# Altium PCB FPv0.11.PcbDoc
Units mm, origin at the board's own origin, x right, y up, seen from the top; angles counter-clockwise.
Board outline 81.28 x 53.34 mm, 4 copper layers (Top Layer, GROUND PLANE, MidLayer1, Bottom Layer); 97 components, 157 nets, 584 pads, 193 vias.
Unrouted connection lines stored in the file: 164.
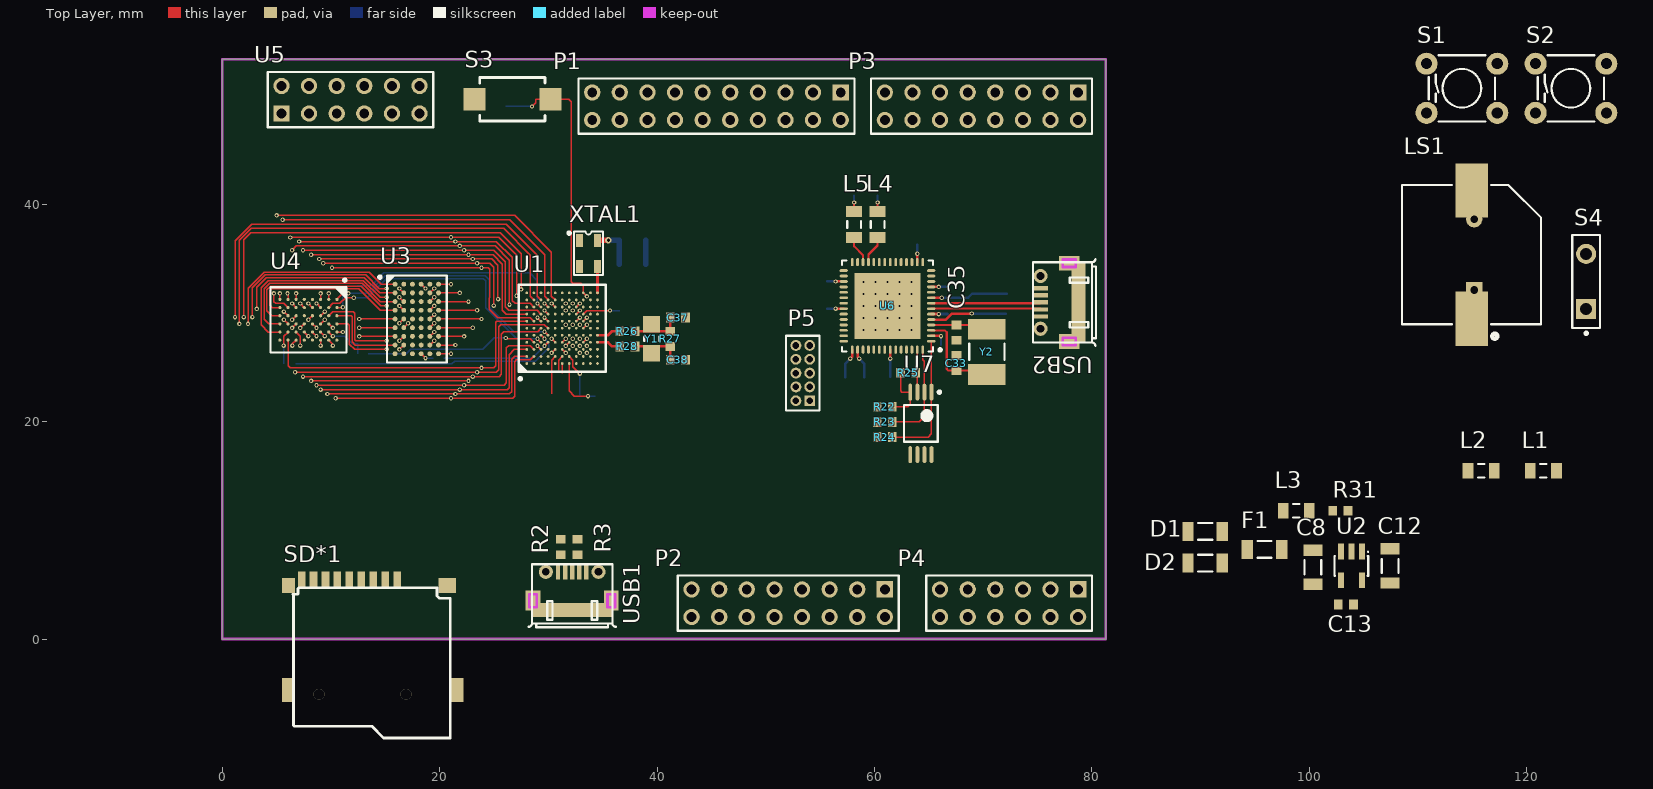
[diagram p0: Top Layer view]
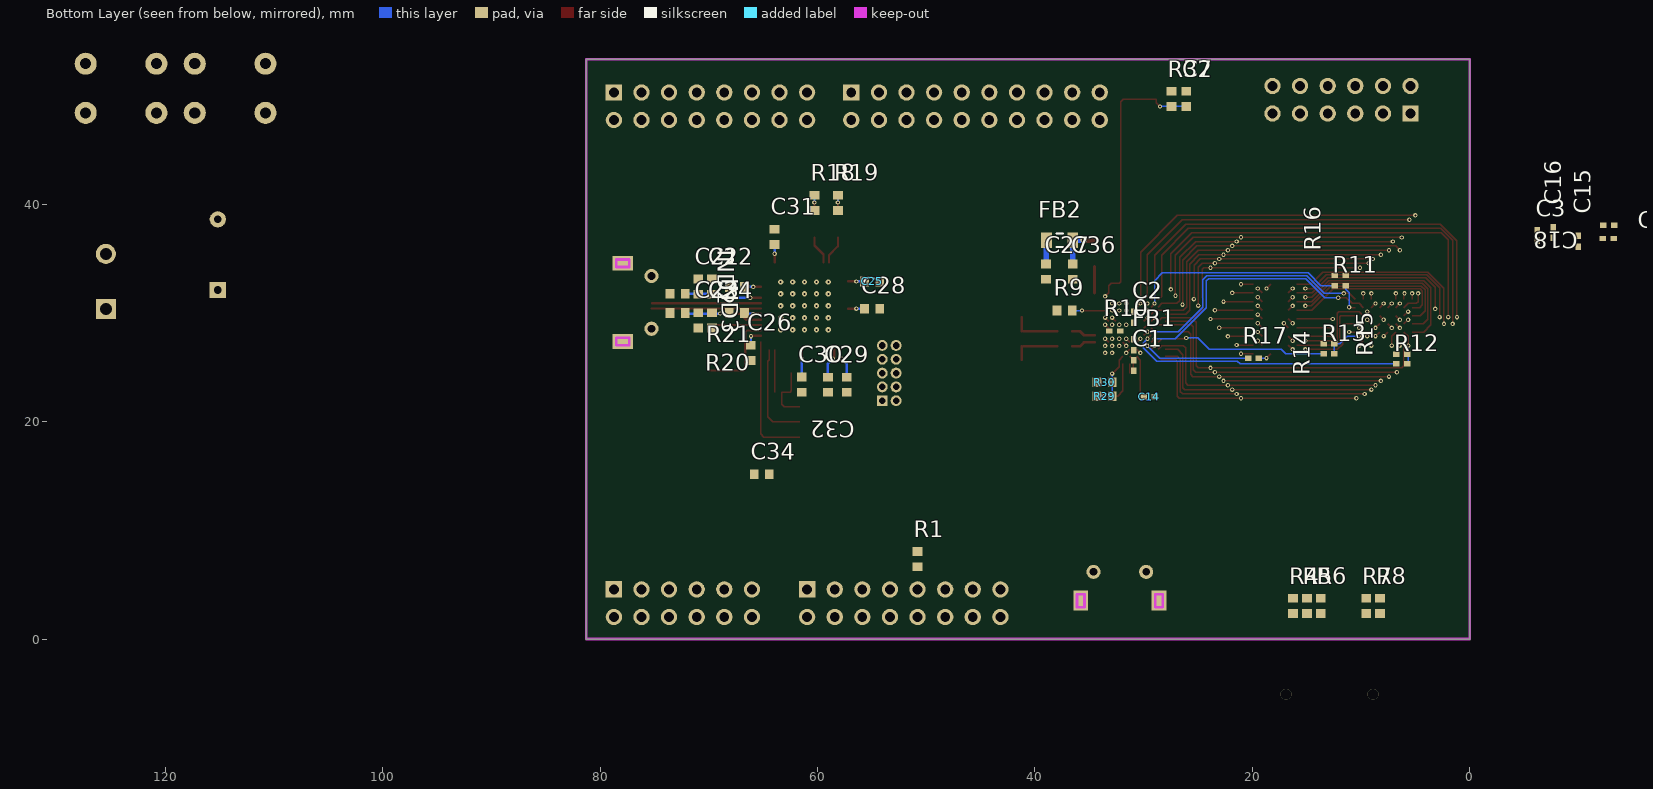
[diagram p1: Bottom Layer view, seen from below]
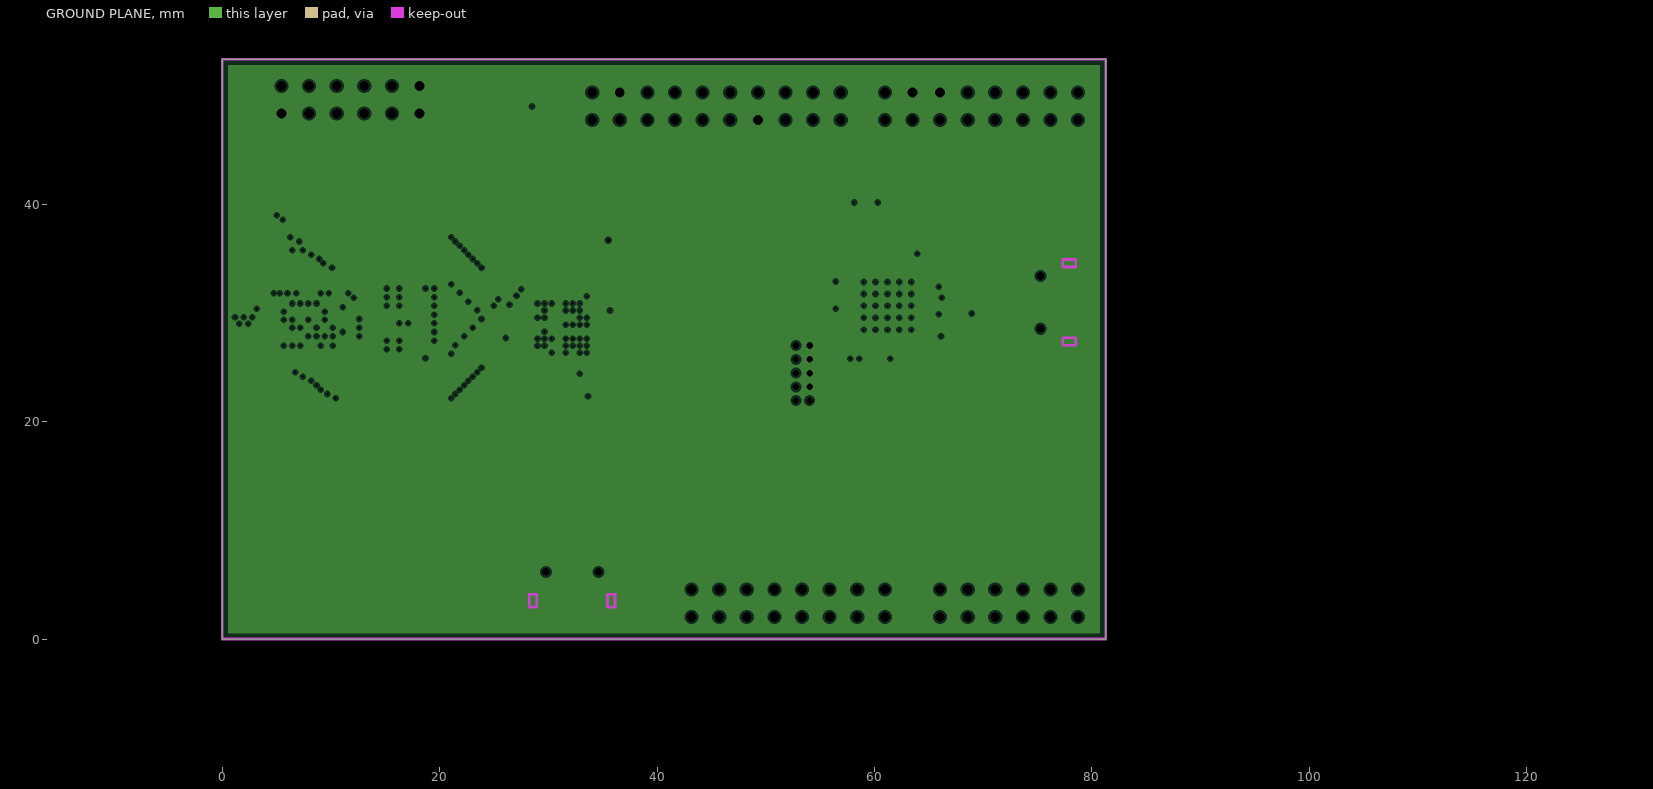
[diagram p2: GROUND PLANE, clearances drawn from the general rule]
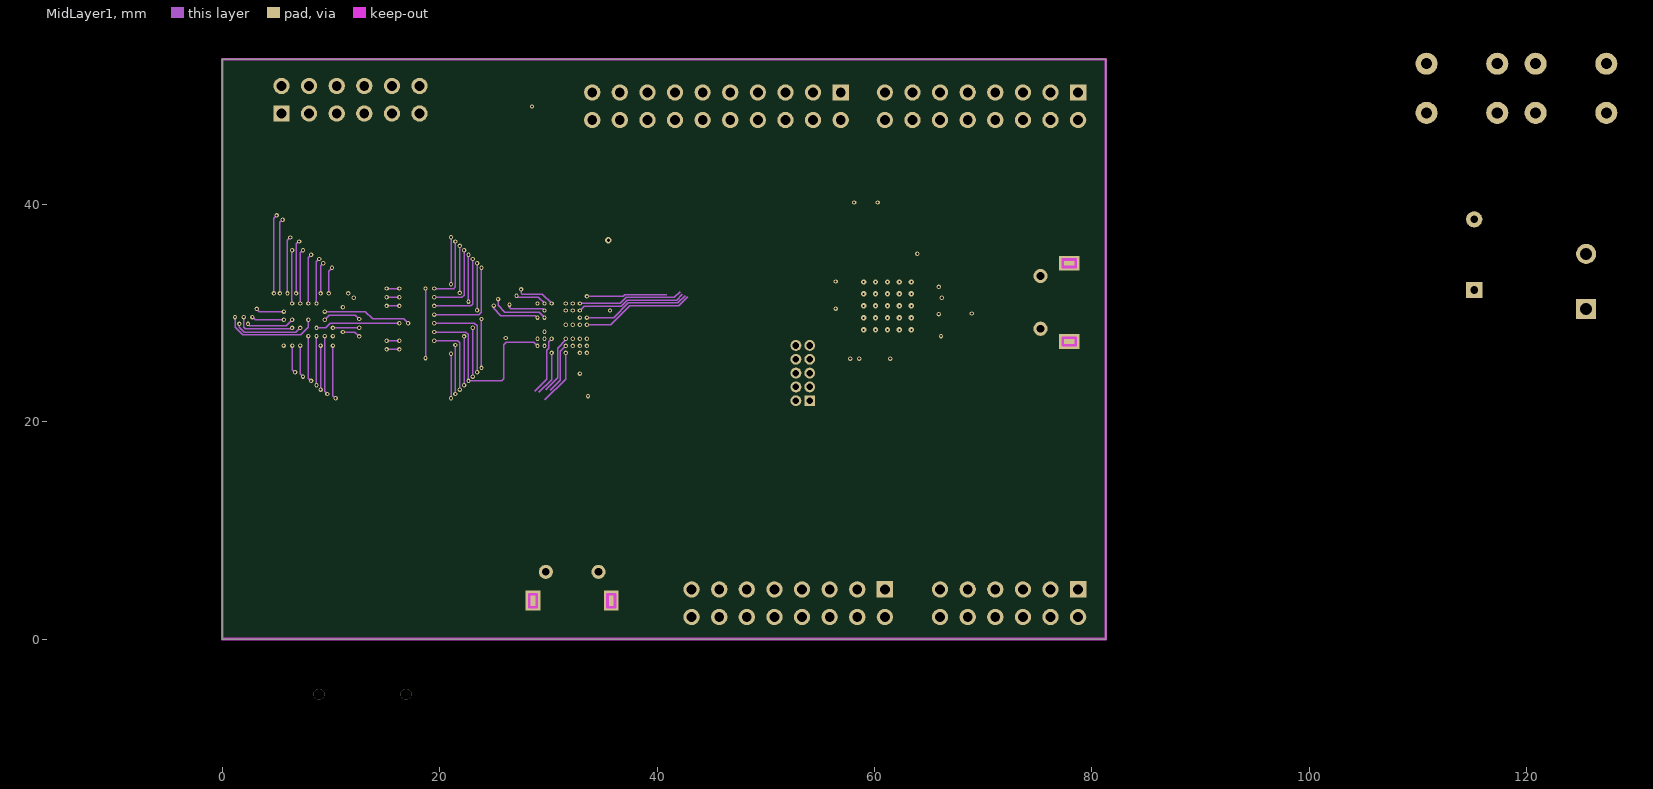
[diagram p3: MidLayer1]

## Layer stack, top to bottom
Top Layer: signal copper 0.0356
Dielectric: prepreg 0.32, FR-4, Dk 4.8
GROUND PLANE: plane copper 0.0356, net GND
Dielectric: core 0.32, FR-4, Dk 4.8
MidLayer1: signal copper 0.0356
Dielectric: prepreg 0.32, FR-4, Dk 4.8
Bottom Layer: signal copper 0.0356

## Board outline
0,0 0,53.34 81.28,53.34 81.28,0

## Design rules (kind name [scope] priority, off if disabled: settings)
Clearance [All] p1: gap=0.127
DiffPairsRouting [All] p1: maxlimit=0.254 minlimit=0.254 mostfreqgap=0.254 maxuncoupledlength=12.7
HoleSize [All] p1: absolutevalues=TRUE maxlimit=2.54 minlimit=0.2 maxpercent=80.000 minpercent=20.000
PlaneClearance [All] p1: clearance=0.203
PlaneConnect [All] p1: planeconnectstyle=Relief reliefexpansion=0.508 reliefentries=4 reliefconductorwidth=0.254 reliefairgap=0.254
PolygonConnect [All] p1: connectstyle=Relief reliefconductorwidth=0.254 reliefentries=4 polygonreliefangle="90 Angle" airgapwidth=0.254
RoutingVias [All] p1: holewidth=0.711 width=1.27 viastyle="Through Hole" minholewidth=0.711 minwidth=1.27 maxholewidth=0.711 maxwidth=1.27
SolderMaskExpansion [All] p1: expansion=0.102
Width [All] p1: maxlimit=1.778 minlimit=0.127 preferedwidth=0.254 midlayer1_maxwidth=0.254 minimp=50.000000 maximp=50.000000 favimp=50.000000
24 further rules are at their usual default settings.

## Classes and differential pairs
net class PTE[0..6]: PTE0 PTE1 PTE2 PTE3 PTE4 PTE5 PTE6 PTE24 PTE25 PTE26
net class AD[20..0]: AD0 AD1 AD2 AD3 AD4 AD5 AD6 AD7 AD8 AD9 AD10 AD11 AD12 AD13 AD14 AD15 AD16 AD17 AD18 AD19 AD20
component class RF_mod: U5
component class protocol2: C21 C22 C23 C24 C25 C26 C28 C29 C30 C31 C32 C33 C34 C35 IND2 IND3 L4 L5 R18 R19 R20 R21 R22 R23 R24 R25 U6 U7 USB2 Y2
component class protocol1: L1 L2 LS1 P1 P2 P3 P4 R1 R2 R3 S1 S2 SD*1 USB1
component class power_manage: C8 C12 C13 D1 D2 F1 L3 R31 S4 U2
component class Memory: C14 C15 C16 C17 C18 R11 R12 R13 R14 R15 R16 R17 U3 U4
component class MCU_K64FX: C1 C2 C3 C7 C27 C36 C37 C38 FB1 FB2 P5 R4 R5 R6 R7 R8 R9 R10 R26 R27 R28 R29 R30 R32 S3 U1 XTAL1 Y1
from-to class SRAM_DATA: "AD0 (U1-B2 : U4-B6)" "AD1 (U1-A2 : U4-C5)" "AD2 (U1-A3 : U4-C6)" "AD3 (U1-B3 : U4-D5)" "AD4 (U1-C3 : U4-E5)" "AD5 (U1-C6 : U4-F5)" "AD6 (U1-D6 : U4-F6)" "AD7 (U1-A7 : U4-G6)" "AD8 (U1-B7 : U4-B1)" "AD9 (U1-C7 : U4-C1)" "AD10 (U1-D7 : U4-C2)" "AD11 (U1-A8 : U4-D2)" "AD12 (U1-C8 : U4-E2)" "AD13 (U1-D8 : U4-F2)" "AD14 (U1-B9 : U4-F1)" "AD15 (U1-D9 : U4-G1)" "AD16 (U1-E9 : U4-F4)" "AD17 (U1-B10 : U4-E4)" "AD18 (U1-C10 : U4-D3)" "AD19 (U1-D10 : U4-H1)" "AD20 (U1-E10 : U4-G2)"
differential pair USB1D: +USB1D_P -USB1D_N
differential pair USB0D: +USB0D_P -USB0D_N

## Components (designator, comment, footprint, x,y, rotation, side; value= is the part's Value field where it differs from the comment)
C1 "Cap" 0402 30.894,25.171 r90 bottom
C2 "Cap" 0402 30.894,29.616 r270 bottom
C3 "Cap" 0402 -6.225,37.125 r90 bottom
C7 "Cap" 1608[0603] 26.075,49.7 r270 bottom
C8 "Cap Pol1" 1206(2) 100.33,6.604 r270 top
C12 "Cap Pol1" 1206(2) 107.442,6.731 r90 top
C13 "Cap" 1608[0603] 103.378,3.175 r180 top
C14 "Cap Pol1" 0402 29.475,22.275 r0 bottom
C15 "Cap" 0402 -9.965,36.584 r270 bottom
C16 "Cap" 0402 -7.679,37.409 r270 bottom
C17 "Cap" 0402 -12.777,38.062 r0 bottom
C18 "Cap" 0402 -12.75,36.85 r180 bottom
C21 "Cap Pol1" 1608[0603] 70.975,32.425 r90 bottom
C22 "Cap" 1608[0603] 69.725,32.425 r270 bottom
C23 "Cap Pol1" 1608[0603] 70.975,29.325 r270 bottom
C24 "Cap" 1608[0603] 69.725,29.325 r90 bottom
C25 "Cap" 1608[0603] 54.975,32.9 r0 bottom
C26 "Cap" 1608[0603] 66.153,26.332 r90 bottom
C27 "Cap" 1608[0603] 38.975,33.8 r90 bottom
C28 "Cap" 1608[0603] 54.977,30.396 r0 bottom
C29 "Cap" 1608[0603] 59.05,23.4 r90 bottom
C30 "Cap" 1608[0603] 61.454,23.411 r90 bottom
C31 "Cap" 1608[0603] 63.95,37 r270 bottom
C32 "Cap" 1608[0603] 57.325,23.4 r270 bottom
C33 "Cap" 1608[0603] 67.55,25.398 r270 top
C34 "Cap" 1608[0603] 65.137,15.156 r0 bottom
C35 "Cap" 1608[0603] 67.55,28.192 r270 top
C36 "Cap" 1608[0603] 36.525,33.8 r90 bottom
C37 "Cap" 1608[0603] 41.925,29.575 r180 top
C38 "Cap" 1608[0603] 41.925,25.7 r180 top
D1 "Diode 1N4001" 1206(2) 90.424,9.906 r0 top
D2 "Diode 1N4001" 1206(2) 90.424,6.985 r0 top
F1 "300-500mA" 1206(2) 95.885,8.255 r0 top
FB1 "Inductor" 0402 30.894,27.076 r90 bottom
FB2 "Inductor" C2012 37.725,36.7 r180 bottom
IND2 "Inductor" 1608[0603] 72.875,31.775 r180 bottom
IND3 "Inductor" 1608[0603] 72.875,30 r180 bottom
L1 "LED" C2012 121.539,15.494 r0 top
L2 "LED" C2012 115.824,15.494 r0 top
L3 "LED" C2012 98.806,11.811 r0 top
L4 "LED" C2012 60.29,38.143 r270 top
L5 "LED" C2012 58.131,38.143 r270 top
LS1 "Buzzer" ABSM-1574 114.935,29.464 r90 top
P1 "Header 10X2" HDR2X10 56.896,50.292 r180 top
P2 "Header 8X2" HDR2X8 60.96,4.572 r180 top
P3 "Header 8X2" HDR2X8 78.74,50.292 r180 top
P4 "Header 6X2" HDR2X6 78.74,4.572 r180 top
P5 "JTAG" MHDR2X5 54.045,21.93 r90 top
R1 "Res" 1608[0603] 50.8,7.366 r90 bottom
R2 "Res" 1608[0603] 31.149,8.471 r270 top
R3 "Res" 1608[0603] 32.673,8.471 r270 top
R4 "Res" 1608[0603] 16.256,3.048 r90 bottom
R5 "Res" 1608[0603] 14.986,3.048 r90 bottom
R6 "Res" 1608[0603] 13.716,3.048 r90 bottom
R7 "Res" 1608[0603] 9.525,3.048 r90 bottom
R8 "Res" 1608[0603] 8.255,3.048 r90 bottom
R9 "Res" 1608[0603] 37.275,30.225 r180 bottom
R10 "Res" 0402 32.672,28.346 r180 bottom
R11 "Res" 0402 11.925,32.525 r0 bottom
R12 "Res" 0402 6.25,25.325 r0 bottom
R13 "Res" 0402 12.95,26.25 r0 bottom
R14 "Res" 0402 12.95,27.175 r0 bottom
R15 "Res" 0402 6.25,26.2 r0 bottom
R16 "Res" 0402 11.925,33.45 r0 bottom
R17 "Res" 0402 19.9,25.825 r180 bottom
R18 "Res" 1608[0603] 60.29,40.121 r270 bottom
R19 "Res" 1608[0603] 58.131,40.121 r270 bottom
R20 "Res" 1608[0603] 67.425,30 r0 bottom
R21 "Res" 1608[0603] 67.425,32.4 r0 bottom
R22 "Res" 1608[0603] 60.946,21.379 r0 top
R23 "Res" 1608[0603] 60.946,19.982 r0 top
R24 "Res" 1608[0603] 60.946,18.585 r0 top
R25 "Res" 1608[0603] 63.1,24.5 r180 top
R26 "Res" 1608[0603] 37.279,28.327 r180 top
R27 "Res" 1608[0603] 41.225,27.625 r270 top
R28 "Res" 1608[0603] 37.279,26.93 r180 top
R29 "Res" 1608[0603] 33.6,22.35 r0 bottom
R30 "Res" 1608[0603] 33.6,23.625 r180 bottom
R31 "Res" 1608[0603] 102.87,11.811 r180 top
R32 "Res" 1608[0603] 27.436,49.694 r270 bottom
S1 "BUTON" TACTILE-PTH 114.046,50.673 r0 top
S2 "BUTON" TACTILE-PTH 124.079,50.673 r0 top
S3 "SW-PB" SMT_Button 26.696,49.667 r0 top
S4 "SW-SPST" SPST-2 125.476,32.893 r90 top
SD*1 "TF_card" SD_card 11.938,-3.302 r90 top
U1 "MK64FX512VDC" BGA121C65P11X11_800X800X50 31.275,28.6 r90 top
U2 "MIC5219" SOT-23-5 103.886,6.731 r180 top
U3 "SN74LVC16373A(BGA54)" BGA54C80P6X9_550X800X120 17.9,29.45 r0 top
U4 "EM7164SU16" BGA48C75P6X8_598X698X104 7.925,29.375 r270 top
U5 "MRF24J40" HDR2X6 5.45,48.35 r0 top
U6 "FT2232H-56" QFN50P800X800X90_HS-57N 61.2,30.65 r180 top
U7 "AT93C46D" TSOP65P640X120-8N-AT93C46D 64.275,19.85 r270 top
USB1 "USB_5line" USB-MICRO-5P-2F 30.895,6.185 r180 top
USB2 "USB_5line" USB-MICRO-5P-2F 75.275,29.675 r270 top
XTAL1 "有源晶体" XTAL7_3225 33.688,35.489 r270 top
Y1 "XTAL" 3215 39.5,27.625 r270 top
Y2 "12MHz" 5032 70.344,26.414 r270 top

## Footprints (in the part's own frame and the unit in brackets; to place one, negate y for a bottom-side part, rotate by r counter-clockwise, add the part's x,y. Pads: shape width x height; smd on the part's side, far side on the other; paste and mask are expansions set on the pad)
0402 [mm] "Chip Capacitor, Body 1.0x0.5mm, IPC High Density"
  rect 0.6x0.5 smd: 1(-0.5,0) 2(0.5,0)
  body extent -0.55,-0.3 0.55,0.3, height 1.3
1206(2) [mm]
  rect 1.05x1.75 smd: 1(-1.575,0) 2(1.575,0)
  silkscreen extent -0.65,-0.77 0.65,0.77, body extent -1.6,-0.8 1.6,0.8, height 1.6
1608[0603] [mm] "Chip Capacitor, Body 1.6x0.8mm, IPC High Density"
  rect 0.8x0.9 smd: 1(-0.7,0) 2(0.7,0)
  body extent -0.87,-0.48 0.87,0.48, height 1.3
3215 [mm]
  rect 1.54x1.55 smd: 1(-1.335,0) 2(1.335,0)
  silkscreen extent -0.2,-0.67 0.2,0.67, body extent -1.65,-0.75 1.65,0.75, height 0.75
5032 [mm]
  rect 1.9x3.45 smd: 1(-2.075,0) 2(2.075,0)
  silkscreen extent -0.75,-1.63 0.75,1.63, body extent -2.6,-1.7 2.6,1.7, height 1.3
ABSM-1574 [mm] "Magnetic Transducer Buzzer"
  rect 5x3 smd: 1(0,0) 2(11.8,0)
  rect 1.5x1.5 hole 0.7: 1A(2.65,-0.24)
  round 1.5 hole 0.7: 2A(9.15,-0.24)
  silkscreen extent -1.83,-6.4 12.3,6.4
BGA48C75P6X8_598X698X104 [mm] "BGA, 48-Leads, Body 5.98x6.98mmx1.04mm, Pitch 0.75mm"
  round 0.29 smd: A1(-1.875,2.625) A2(-1.125,2.625) A3(-0.375,2.625) A4(0.375,2.625) A5(1.125,2.625) A6(1.875,2.625) B1(-1.875,1.875) B2(-1.125,1.875) B3(-0.375,1.875) B4(0.375,1.875) B5(1.125,1.875) B6(1.875,1.875) C1(-1.875,1.125) C2(-1.125,1.125) C3(-0.375,1.125) C4(0.375,1.125) C5(1.125,1.125) C6(1.875,1.125) D1(-1.875,0.375) D2(-1.125,0.375) D3(-0.375,0.375) D4(0.375,0.375) D5(1.125,0.375) D6(1.875,0.375) E1(-1.875,-0.375) E2(-1.125,-0.375) E3(-0.375,-0.375) E4(0.375,-0.375) E5(1.125,-0.375) E6(1.875,-0.375) F1(-1.875,-1.125) F2(-1.125,-1.125) F3(-0.375,-1.125) F4(0.375,-1.125) F5(1.125,-1.125) F6(1.875,-1.125) G1(-1.875,-1.875) G2(-1.125,-1.875) G3(-0.375,-1.875) G4(0.375,-1.875) G5(1.125,-1.875) G6(1.875,-1.875) H1(-1.875,-2.625) H2(-1.125,-2.625) H3(-0.375,-2.625) H4(0.375,-2.625) H5(1.125,-2.625) H6(1.875,-2.625)
  silkscreen extent -3.77,-3.5 3,3.5, body extent -2.99,-3.49 2.99,3.49, height 1.04
BGA54C80P6X9_550X800X120 [mm] "BGA, 54-Leads, Body 5.50x8.00mmx1.20mm, Pitch 0.80mm"
  round 0.45 smd: A1(-2,3.2) A2(-1.2,3.2) A3(-0.4,3.2) A4(0.4,3.2) A5(1.2,3.2) A6(2,3.2) B1(-2,2.4) B2(-1.2,2.4) B3(-0.4,2.4) B4(0.4,2.4) B5(1.2,2.4) B6(2,2.4) C1(-2,1.6) C2(-1.2,1.6) C3(-0.4,1.6) C4(0.4,1.6) C5(1.2,1.6) C6(2,1.6) D1(-2,0.8) D2(-1.2,0.8) D3(-0.4,0.8) D4(0.4,0.8) D5(1.2,0.8) D6(2,0.8) E1(-2,0) E2(-1.2,0) E3(-0.4,0) E4(0.4,0) E5(1.2,0) E6(2,0) F1(-2,-0.8) F2(-1.2,-0.8) F3(-0.4,-0.8) F4(0.4,-0.8) F5(1.2,-0.8) F6(2,-0.8) G1(-2,-1.6) G2(-1.2,-1.6) G3(-0.4,-1.6) G4(0.4,-1.6) G5(1.2,-1.6) G6(2,-1.6) H1(-2,-2.4) H2(-1.2,-2.4) H3(-0.4,-2.4) H4(0.4,-2.4) H5(1.2,-2.4) H6(2,-2.4) J1(-2,-3.2) J2(-1.2,-3.2) J3(-0.4,-3.2) J4(0.4,-3.2) J5(1.2,-3.2) J6(2,-3.2)
  silkscreen extent -3.52,-4 2.75,4, body extent -2.75,-4 2.75,4, height 1.2
BGA121C65P11X11_800X800X50 [mm] "BGA, 121-Leads, Body 8.00x8.00mmx0.50mm, Pitch 0.65mm"
  round 0.25 smd: A1(-3.25,3.25) A2(-2.6,3.25) A3(-1.95,3.25) A4(-1.3,3.25) A5(-0.65,3.25) A6(0,3.25) A7(0.65,3.25) A8(1.3,3.25) A9(1.95,3.25) A10(2.6,3.25) A11(3.25,3.25) B1(-3.25,2.6) B2(-2.6,2.6) B3(-1.95,2.6) B4(-1.3,2.6) B5(-0.65,2.6) B6(0,2.6) B7(0.65,2.6) B8(1.3,2.6) B9(1.95,2.6) B10(2.6,2.6) B11(3.25,2.6) C1(-3.25,1.95) C2(-2.6,1.95) C3(-1.95,1.95) C4(-1.3,1.95) C5(-0.65,1.95) C6(0,1.95) C7(0.65,1.95) C8(1.3,1.95) C9(1.95,1.95) C10(2.6,1.95) C11(3.25,1.95) D1(-3.25,1.3) D2(-2.6,1.3) D3(-1.95,1.3) D4(-1.3,1.3) D5(-0.65,1.3) D6(0,1.3) D7(0.65,1.3) D8(1.3,1.3) D9(1.95,1.3) D10(2.6,1.3) D11(3.25,1.3) E1(-3.25,0.65) E2(-2.6,0.65) E3(-1.95,0.65) E4(-1.3,0.65) E5(-0.65,0.65) E6(0,0.65) E7(0.65,0.65) E8(1.3,0.65) E9(1.95,0.65) E10(2.6,0.65) E11(3.25,0.65) F1(-3.25,0) F2(-2.6,0) F3(-1.95,0) F4(-1.3,0) F5(-0.65,0) F6(0,0) F7(0.65,0) F8(1.3,0) F9(1.95,0) F10(2.6,0) F11(3.25,0) G1(-3.25,-0.65) G2(-2.6,-0.65) G3(-1.95,-0.65) G4(-1.3,-0.65) G5(-0.65,-0.65) G6(0,-0.65) G7(0.65,-0.65) G8(1.3,-0.65) G9(1.95,-0.65) G10(2.6,-0.65) G11(3.25,-0.65) H1(-3.25,-1.3) H2(-2.6,-1.3) H3(-1.95,-1.3) H4(-1.3,-1.3) H5(-0.65,-1.3) H6(0,-1.3) H7(0.65,-1.3) H8(1.3,-1.3) H9(1.95,-1.3) H10(2.6,-1.3) H11(3.25,-1.3) J1(-3.25,-1.95) J2(-2.6,-1.95) J3(-1.95,-1.95) J4(-1.3,-1.95) J5(-0.65,-1.95) J6(0,-1.95) J7(0.65,-1.95) J8(1.3,-1.95) J9(1.95,-1.95) J10(2.6,-1.95) J11(3.25,-1.95) K1(-3.25,-2.6) K2(-2.6,-2.6) K3(-1.95,-2.6) K4(-1.3,-2.6) K5(-0.65,-2.6) K6(0,-2.6) K7(0.65,-2.6) K8(1.3,-2.6) K9(1.95,-2.6) K10(2.6,-2.6) K11(3.25,-2.6) L1(-3.25,-3.25) L2(-2.6,-3.25) L3(-1.95,-3.25) L4(-1.3,-3.25) L5(-0.65,-3.25) L6(0,-3.25) L7(0.65,-3.25) L8(1.3,-3.25) L9(1.95,-3.25) L10(2.6,-3.25) L11(3.25,-3.25)
  silkscreen extent -4.77,-4 4,4, body extent -4,-4 4,4, height 0.5
C2012 [mm] "Chip Capacitor, 2-Leads, Body 2.0x1.2mm, IPC Low Density"
  rect 1x1.45 smd: 1(-1.2,0) 2(1.2,0)
  silkscreen extent -0.3,-0.63 0.3,0.63, body extent -0.98,-0.6 1.02,0.6, height 0.5
HDR2X6 [mm] "Connector; Header; 6x2 Position"
  rect 1.5x1.5 hole 0.9: 1(0,0)
  round 1.5 hole 0.9: 2(0,2.54) 3(2.54,0) 4(2.54,2.54) 5(5.08,0) 6(5.08,2.54) 7(7.62,0) 8(7.62,2.54) 9(10.16,0) 10(10.16,2.54) 11(12.7,0) 12(12.7,2.54)
  silkscreen extent -1.27,-1.27 13.97,3.81, body extent -1.27,-1.27 13.97,3.81, height 7.58
HDR2X8 [mm] "Connector; Header; 8x2 Position"
  rect 1.5x1.5 hole 0.9: 1(0,0)
  round 1.5 hole 0.9: 2(0,2.54) 3(2.54,0) 4(2.54,2.54) 5(5.08,0) 6(5.08,2.54) 7(7.62,0) 8(7.62,2.54) 9(10.16,0) 10(10.16,2.54) 11(12.7,0) 12(12.7,2.54) 13(15.24,0) 14(15.24,2.54) 15(17.78,0) 16(17.78,2.54)
  silkscreen extent -1.27,-1.27 19.05,3.81, body extent -1.27,-1.27 19.05,3.81, height 7.58
HDR2X10 [mm] "Connector; Header; 10x2 Position"
  rect 1.5x1.5 hole 0.9: 1(0,0)
  round 1.5 hole 0.9: 2(0,2.54) 3(2.54,0) 4(2.54,2.54) 5(5.08,0) 6(5.08,2.54) 7(7.62,0) 8(7.62,2.54) 9(10.16,0) 10(10.16,2.54) 11(12.7,0) 12(12.7,2.54) 13(15.24,0) 14(15.24,2.54) 15(17.78,0) 16(17.78,2.54) 17(20.32,0) 18(20.32,2.54) 19(22.86,0) 20(22.86,2.54)
  silkscreen extent -1.27,-1.27 24.13,3.81, body extent -1.27,-1.27 24.13,3.81, height 7.58
MHDR2X5 [mm] "Connector; Header; 5x2 Position"
  rect 1x1 hole 0.6: 1(0,0)
  round 1 hole 0.6: 2(0,1.27) 3(1.27,0) 4(1.27,1.27) 5(2.54,0) 6(2.54,1.27) 7(3.81,0) 8(3.81,1.27) 9(5.08,0) 10(5.08,1.27)
  silkscreen extent -0.9,-0.9 5.98,2.17
QFN50P800X800X90_HS-57N [mm] "QFN, 56-Leads, Body 8.00x8.00mm, Pitch 0.50mm, Thermal Pad 6.10x6.10mm, IPC Medium Density"
  oval 0.75x0.25 smd: 1(-4.025,3.25) 2(-4.025,2.75) 3(-4.025,2.25) 4(-4.025,1.75) 5(-4.025,1.25) 6(-4.025,0.75) 7(-4.025,0.25) 8(-4.025,-0.25) 9(-4.025,-0.75) 10(-4.025,-1.25) 11(-4.025,-1.75) 12(-4.025,-2.25) 13(-4.025,-2.75) 14(-4.025,-3.25) 29(4.025,-3.25) 30(4.025,-2.75) 31(4.025,-2.25) 32(4.025,-1.75) 33(4.025,-1.25) 34(4.025,-0.75) 35(4.025,-0.25) 36(4.025,0.25) 37(4.025,0.75) 38(4.025,1.25) 39(4.025,1.75) 40(4.025,2.25) 41(4.025,2.75) 42(4.025,3.25)
  oval 0.25x0.75 smd: 15(-3.25,-4.025) 16(-2.75,-4.025) 17(-2.25,-4.025) 18(-1.75,-4.025) 19(-1.25,-4.025) 20(-0.75,-4.025) 21(-0.25,-4.025) 22(0.25,-4.025) 23(0.75,-4.025) 24(1.25,-4.025) 25(1.75,-4.025) 26(2.25,-4.025) 27(2.75,-4.025) 28(3.25,-4.025) 43(3.25,4.025) 44(2.75,4.025) 45(2.25,4.025) 46(1.75,4.025) 47(1.25,4.025) 48(0.75,4.025) 49(0.25,4.025) 50(-0.25,4.025) 51(-0.75,4.025) 52(-1.25,4.025) 53(-1.75,4.025) 54(-2.25,4.025) 55(-2.75,4.025) 56(-3.25,4.025)
  rect 6.1x6.1 smd: 57(0,0)
  silkscreen extent -4.97,-4.19 4.19,4.19, body extent -4.04,-4.04 4.04,4.04, height 0.9
SD_card [mm]
  rect 1.6x0.7 smd: 1(8.732,-4.16) 2(8.732,-3.06) 3(8.732,-1.96) 4(8.732,-0.86) 5(8.732,0.24) 6(8.732,1.34) 7(8.732,2.44) 8(8.732,3.54) 9(8.732,4.64)
  rect 1.4x1.2 smd: 10(8.232,5.84)
  rect 2.2x1.2 smd: 11(-1.368,5.84) 12(-1.368,-9.66)
  rect 1.4x1.6 smd: 13(8.232,-8.76)
  silkscreen extent -5.79,-9.04 8.03,5.43
SMT_Button [mil]
  rect 80x80 smd: 1(-137.8,0) 2(137.8,0)
  silkscreen extent -118,-79 118,79
SOT-23-5 [mm] "SOT-23/SC-74A; 5 Leads; Body 3.1 x 3 mm, inc. leads (LxW max)"
  rect 0.55x1.45 smd: 1(-0.95,-1.329) 2(0,-1.329) 3(0.95,-1.329) 4(0.95,1.329) 5(-0.95,1.329)
  silkscreen extent -1.57,-1.35 1.55,0.9
SPST-2 [mm] "Switch; 2 Leads"
  rect 1.85x1.85 hole 1.1: 1(-2.54,0)
  round 1.85 hole 1.1: 2(2.54,0)
  silkscreen extent -4.89,-1.27 4.28,1.27
TACTILE-PTH [mil] "直插按钮"
  round 80 hole 40: 1(-128,89) 2(128,89) 3(-128,-89) 4(128,-89)
  silkscreen extent -120,-120 120,120, body extent -162,-118 162,118, height 213
TSOP65P640X120-8N-AT93C46D [mm] "TSOP, 8-Leads, Body 3.00x4.40mm, Pitch 0.65mm, IPC Medium Density"
  oval 1.55x0.35 smd: 1(-2.875,0.975) 2(-2.875,0.325) 3(-2.875,-0.325) 4(-2.875,-0.975) 5(2.875,-0.975) 6(2.875,-0.325) 7(2.875,0.325) 8(2.875,0.975)
  silkscreen extent -3,-1.55 1.7,1.83, body extent -2.25,-1.55 2.25,1.55, height 1.2
USB-MICRO-5P-2F [mm]
  round 1.3 hole 0.7: 0(-3.725,0) 0(1.125,0)
  rect 0.4x1.4 smd: 1(0,0) 2(-0.65,0) 3(-1.3,0) 4(-1.95,0) 5(-2.6,0)
  rect 1.35x1.85 all layers, no hole: 6(2.3,2.65) 7(-4.9,2.65)
  rect 7.35x1.3 smd: 8(-1.3,3.5)
  Keep-Out Layer lines w0.254: 2.65,3.25 1.95,3.25 1.95,2.05 2.65,2.05 2.65,3.25 ; -4.55,3.25 -4.55,2.05 -5.25,2.05 -5.25,3.25 -4.55,3.25
  silkscreen extent -5.3,-0.7 2.7,5.1
XTAL7_3225 [mil]
  rect 47.2x25.6 smd: 1(-47.25,-32.5) 2(47.25,-32.5) 3(47.25,32.5) 4(-47.25,32.5)
  silkscreen extent -79,-75 79,53

## Part data
C1 C2 C3 C7 C13 C15 C16 C17 C18 C22 C24 C25 C26 C27 C28 C29 C30 C31 C32 C33 C34 C35 C36 C37 C38: "贴片电容"
C8 C12 C14 C21 C23: "Polarized Capacitor (Radial)"
D1 D2: "1 Amp General Purpose Rectifier"
F1: library part "Fuse 1", "Fuse"
LS1: "Magnetic Transducer Buzzer"
P1: "Header, 10-Pin, Dual row"
P2 P3: "Header, 8-Pin, Dual row"
P4: "Header, 6-Pin, Dual row"
P5: library part "Header 5X2", "Header, 5-Pin, Dual row"
R1 R2 R3 R4 R5 R6 R7 R8 R9 R10 R11 R12 R13 R14 R15 R16 R17 R18 R19 R20 R21 R22 R23 R24 R25 R26 R27 R28 R29 R30 R31 R32: "贴片电阻"
S3: "Switch"
S4: "Single-Pole, Single-Throw Switch"
U2: "LDO"
Y1: "晶体振荡器"
Y2: library part XTAL, "晶体振荡器"

## Via types
v1: diameter 0.403, hole 0.2, Top Layer to Bottom Layer, tented both sides, 165 vias
v2: diameter 0.5, hole 0.2, Top Layer to Bottom Layer, 25 vias
v3: diameter 1, hole 1, Top Layer to Bottom Layer, 2 vias
v4: diameter 0.603, hole 0.3, Top Layer to Bottom Layer, tented both sides, 1 vias

## Nets (pads, with @x,y where several pads share a name; then routed paths per layer and width w, separated by ;. In a path a pad name is that pad's centre, name@x,y a point inside that pad or via, vN(x,y) a via of type N, cw(c..) or ccw(c..) an arc to the next point about the centre after c; other vN are vias at no path point)
1.8V: C25.2 C26.2 C32.1 U6.2 U6.31 U6.43 | length 6
  Top Layer w0.229: v1(56.425,32.9) U6.31 ; v1(57.775,25.8) 57.95,25.975 U6.43 ; U6.2 v1@66.1,27.9
  Bottom Layer w0.229: C25.2 v1(56.425,32.9) ; C32.1 57.325,25.35 v1(57.775,25.8) ; C26.2@66.125,27.06 v1(66.125,27.875)
3.3V: C1.2 C2.2 C3.2 C12.1 C14.1 C15.2 C16.2 C17.2 C18.2 C27.2 C28.2 C29.2 C30.2 C31.2 C34.2 FB1.1 FB2.1 IND2.1 IND3.1 P3.3 P3.7 P5.1 R4.1 R5.1 R6.1 R7.1 R8.1 R9.1 R14.2 R15.2 R16.2 R18.2 R19.2 R21.2 R22.1 R23.1 R24.1 R32.1 SD*1.4 U1.E5 U1.E6 U1.E7 U1.K6 U1.L10 U2.5 U3.C3 U3.C4 U3.G3 U3.G4 U4.A6 U4.D6 U4.E1 U5.10 U6.16 U6.36 U6.44 U6.50 U7.6 U7.8 | length 10.6
  Top Layer w0.229: v1(56.425,30.4) U6.36 ; U6.44 58.45,25.95 v1(58.6,25.8) ; v1(61.45,25.8) U6.50 ; U6.16 v1(63.95,35.45)
  Bottom Layer w0.229: C28.2 v1@56.421,30.396 ; v1(58.6,25.8) 59.05,25.35 C29.2 ; C30.2@61.45,24.115 v1(61.45,25.8) ; v1(63.95,35.45) C31.2
  Bottom Layer w0.508: C27.2 FB2.1@38.975,36.7
5V: C8.1 F1.2 L3.1 P3.9 U2.1 U2.3
50MHZ: U1.L11 XTAL1.3 | length 2.4
  Top Layer w0.254: U1.L11 XTAL1.3@34.525,34.277
AD0: U1.B2 U3.J6 U4.B6 | length 32.6
  Top Layer w0.127: U4.B6 10.175,27.125 v1(10.175,27) ; v1(10.425,22.15) v1(21.05,22.15) 26.725,22.15 26.901,22.326 26.901,25.533 27.051,25.683 28.358,25.683 U1.B2 ; U3.J6 v1(21.05,26.25)
  MidLayer1 w0.127: v1(10.175,27) 10.175,22.4 v1(10.425,22.15) ; v1(21.05,22.15) v1(21.05,26.25)
AD1: U1.A2 U3.H6 U4.C5 | length 33.6
  Top Layer w0.127: U4.C5 v1(9.425,27.875) ; v1(9.675,22.55) v1(21.45,22.55) 26.425,22.55 26.647,22.772 26.647,25.733 26.914,26 U1.A2 ; U3.H6 v1(21.45,27.05)
  MidLayer1 w0.127: v1(9.425,27.875) 9.442,27.858 9.442,22.783 v1(9.675,22.55) ; v1@21.4,27.05 v1@21.442,27.008 ; v1(21.45,22.55) v1(21.45,27.05)
AD2: U1.A3 U3.H5 U4.C6 | length 34.1
  Top Layer w0.127: v1(9.05,22.95) v1(21.85,22.95) 26.2,22.95 26.393,23.143 26.393,26.179 26.864,26.65 U1.A3 ; v1(9.05,27) U4.C6 ; U3.H5 v1(19.5,27.45)
  MidLayer1 w0.127: v1(9.05,27) 9.067,26.983 v1@9.067,22.95 ; v1(19.5,27.45) 21.65,27.45 21.85,27.25 v1(21.85,22.95)
AD3: U1.B3 U3.G6 U4.D5 | length 35.4
  Top Layer w0.127: U4.D5 v1(8.675,27.875) ; v1(8.675,23.35) v1(22.25,23.35) 25.925,23.35 26.139,23.564 26.139,26.783 26.339,26.983 28.342,26.983 U1.B3 ; U3.G6 v1(22.25,27.85)
  MidLayer1 w0.127: v1@8.658,23.35 8.658,27.858 v1(8.675,27.875) ; v1(22.25,23.35) v1(22.25,27.85)
AD4: U1.C3 U3.G5 U4.E5 | length 37.4
  Top Layer w0.127: U4.E5 v1(7.925,27.875) ; v1(8.175,23.75) v1@22.45,23.75 ; U3.G5 v1(19.5,28.25) ; v1(29,26.975) U1.C3
  MidLayer1 w0.127: v1(7.925,27.875) 7.925,24 v1(8.175,23.75) ; v1(19.5,28.25) 22.425,28.25 22.65,28.025 v1@22.65,23.758 ; v1@22.658,23.758 25.708,23.758 25.889,23.939 25.889,27.083 26.114,27.308 28.667,27.308 v1(29,26.975)
  other v1: 22.65,23.75
AD5: U1.C6 U3.F6 U4.F5 | length 37.9
  Top Layer w0.127: U4.F5 7.175,27.875 v1(7.175,27) ; v1(7.425,24.15) v1(23.05,24.15) 25.475,24.15 25.672,24.347 25.672,28.058 25.897,28.283 29.008,28.283 U1.C6 ; U3.F6 v1(23.05,28.65)
  MidLayer1 w0.127: v1(7.175,27) 7.175,24.4 v1(7.425,24.15) ; v1(23.05,24.15) v1(23.05,28.65)
AD6: U1.D6 U3.F5 U4.F6 | length 39.6
  Top Layer w0.127: v1@6.425,27 v1(6.45,27) 6.45,27.15 U4.F6 ; v1(6.7,24.55) v1(23.45,24.55) 25.2,24.55 25.418,24.768 25.418,28.733 25.618,28.933 29.642,28.933 U1.D6 ; U3.F5 v1(19.5,29.05)
  MidLayer1 w0.127: v1(6.45,27) 6.45,24.8 v1(6.7,24.55) ; v1(19.5,29.05) 23.205,29.05 23.45,28.805 v1(23.45,24.55)
AD7: U1.A7 U3.E6 U4.G6 | length 37
  Top Layer w0.127: U4.G6 6.05,25.15 6.25,24.95 v1(23.85,24.95) 24.975,24.95 25.164,25.139 25.164,29.158 25.256,29.25 U1.A7 ; U3.E6 v1(23.85,29.45)
  MidLayer1 w0.127: v1(23.85,24.95) v1(23.85,29.45)
AD8: U1.B7 U3.E5 U4.B1 | length 34.9
  Top Layer w0.127: U4.B1 v1(9.8,31.8) ; v1(10.1,34.158) v1(23.85,34.158) 24.467,34.158 24.589,34.036 24.589,31.419 24.583,31.412 24.583,30.364 25.364,29.583 28.342,29.583 U1.B7 ; U3.E5 v1(19.5,29.85)
  MidLayer1 w0.127: v1(9.8,31.8) 9.8,33.858 v1(10.1,34.158) ; v1(19.5,29.85) 19.508,29.858 23.612,29.858 23.842,30.088 v1@23.842,34.15 ; v1@23.842,34.158 v1@23.842,34.15 ; v1(23.85,34.158) v1@23.842,34.15
AD9: U1.C7 U3.D6 U4.C1 | length 35.7
  Top Layer w0.127: U4.C1 v1(9.05,31.8) ; v1(9.3,34.575) v1(23.45,34.575) 24.6,34.575 24.975,34.2 v1(24.975,30.675) ; U3.D6 v1(23.45,30.25) ; v1(29,29.575) U1.C7
  MidLayer1 w0.127: v1(9.05,31.8) 9.05,34.325 v1(9.3,34.575) ; v1(23.45,30.25) v1(23.45,34.575) ; v1(24.975,30.675) 24.975,30.425 25.642,29.758 28.817,29.758 v1(29,29.575)
AD10: U1.D7 U3.D5 U4.C2 | length 38.7
  Top Layer w0.127: v1(8.675,30.875) U4.C2 ; v1(8.925,34.967) v1(23.05,34.967) 24.808,34.967 25.367,34.408 25.367,31.285 v1(25.377,31.275) ; U3.D5 v1(19.5,30.65) ; v1(29.65,29.575) U1.D7
  MidLayer1 w0.127: v1(8.675,30.875) 8.658,30.892 8.658,34.7 v1(8.925,34.967) ; v1(19.5,30.65) 22.875,30.65 23.05,30.825 v1(23.05,34.967) ; v1(25.377,31.275) 25.377,30.698 25.992,30.083 29.142,30.083 v1(29.65,29.575)
AD11: U1.A8 U3.C6 U4.D2 | length 36.8
  Top Layer w0.127: v1(7.925,30.875) U4.D2 ; v1@8.175,35.359 v1(22.65,35.359) 24.916,35.359 25.771,34.504 25.771,30.254 26.125,29.9 U1.A8 ; U3.C6 v1(22.65,31.05)
  MidLayer1 w0.127: v1(7.925,30.875) 7.925,35.1 v1(8.175,35.35) ; v1(22.65,31.05) v1(22.65,35.359)
AD12: U1.C8 U3.C5 U4.E2 | length 39.8
  Top Layer w0.127: v1(7.175,30.875) U4.E2 ; v1(7.425,35.775) v1(22.25,35.775) 24.975,35.775 26.025,34.725 26.025,30.572 26.364,30.233 28.992,30.233 U1.C8 ; U3.C5 v1(19.5,31.45)
  MidLayer1 w0.127: v1(7.175,30.875) 7.192,30.892 7.192,35.542 v1(7.425,35.775) ; v1(19.5,31.45) 22.05,31.45 22.25,31.65 v1(22.25,35.775)
AD13: U1.D8 U3.B6 U4.F2 | length 40.6
  Top Layer w0.127: v1(6.425,30.875) U4.F2 ; v1(6.425,35.775) 6.825,36.175 v1(21.85,36.175) 25.1,36.175 26.425,34.85 v1(26.425,30.775) ; U3.B6 v1(21.85,31.85) ; v1(29.65,30.225) U1.D8
  MidLayer1 w0.127: v1(6.425,30.875) 6.408,30.892 6.408,35.758 v1(6.425,35.775) ; v1(21.85,31.85) v1(21.85,36.175) ; v1(26.425,30.775) 26.425,30.547 26.564,30.408 29.467,30.408 v1(29.65,30.225)
AD14: U1.B9 U3.B5 U4.F1 | length 38.6
  Top Layer w0.127: U4.F1 v1(6.8,31.8) ; v1(7.075,36.575) v1(21.45,36.575) 25.225,36.575 26.679,35.121 26.679,31.146 26.942,30.883 28.342,30.883 U1.B9 ; U3.B5 v1(19.5,32.25)
  MidLayer1 w0.127: v1(6.8,31.8) 6.817,31.817 6.817,36.392 v1@7,36.575 ; v1(19.5,32.25) 21.3,32.25 21.45,32.4 v1(21.45,36.575)
AD15: U1.D9 U3.A6 U4.G1 | length 39.8
  Top Layer w0.127: U4.G1 v1@6.05,31.75 ; v1@6.25,36.975 v1(21.05,36.975) 25.425,36.975 27.075,35.325 v1(27.075,31.583) ; U3.A6 v1(21.05,32.65) ; v1(29.65,30.875) U1.D9
  MidLayer1 w0.127: v1(6,31.8) 6,36.7 v1(6.25,36.95) ; v1(21.05,32.65) v1(21.05,36.975) ; v1(27.075,31.583) 27.225,31.433 29.092,31.433 v1(29.65,30.875)
AD16: U1.E9 U4.F4 | length 47
  Top Layer w0.127: v1(1.983,29.625) 1.983,36.733 2.625,37.375 25.575,37.375 27.5,35.45 v1(27.5,32.175) ; v1(6.425,28.625) U4.F4 ; v1(30.3,30.875) U1.E9
  MidLayer1 w0.127: v1(1.983,29.625) 1.983,28.692 2.104,28.571 6.371,28.571 v1(6.425,28.625) ; v1(27.5,32.175) 27.5,31.808 27.575,31.733 29.442,31.733 v1(30.3,30.875)
AD17: U1.B10 U4.E4 | length 47
  Top Layer w0.127: v1(1.58,29) 1.58,36.689 2.666,37.775 25.9,37.775 28.35,35.325 28.35,31.525 U1.B10 ; v1(7.175,28.625) U4.E4
  MidLayer1 w0.127: v1(1.58,29) 1.58,28.67 2.017,28.233 6.783,28.233 v1(7.175,28.625)
AD18: U1.C10 U4.D3 | length 50.4
  Top Layer w0.127: v1(1.175,29.625) 1.175,36.643 2.699,38.167 26.133,38.167 29,35.3 29,31.525 U1.C10 ; v1(7.925,29.375) U4.D3
  MidLayer1 w0.127: v1(1.175,29.625) 1.175,28.7 1.896,27.979 7.204,27.979 7.925,28.7 v1(7.925,29.375)
AD19: U1.D10 U4.H1 | length 37.3
  Top Layer w0.127: U4.H1 v1(5.3,31.8) ; v1(5.55,38.575) 26.45,38.575 29.65,35.375 29.65,31.525 U1.D10
  MidLayer1 w0.127: v1(5.3,31.8) 5.3,38.325 v1(5.55,38.575) v1@5.675,38.575
AD20: U1.E10 U4.G2 | length 40.8
  Top Layer w0.127: v1@4.75,31.825 v1(4.75,31.8) 4.75,31.05 4.925,30.875 5.675,30.875 U4.G2 ; v1(5,38.975) 26.9,38.975 30.289,35.586 30.289,31.984 30.291,31.982 30.291,31.534 U1.E10
  MidLayer1 w0.127: v1(4.75,31.8) 4.75,38.725 v1(5,38.975)
ADC0_DM0/ADC1_DM3: P1.13
ADC0_DM1: P4.4
ADC0_DP0/ADC1_DP3: P1.15
ADC0_DP1: P4.2
ADC1_DM0/ADC0_DM3: P1.7
ADC1_DM1: P4.8
ADC1_DP0/ADC0_DP3: P1.9
ADC1_DP1: P4.6
ADC1_SE18: P1.3
ADDR0: U3.J1
ADDR1: U3.H1 U4.A3 | length 7.8
  Top Layer w0.127: U4.A3 11.875,29.75 11.95,29.675 11.95,27.35 12.25,27.05 U3.H1
ADDR2: U3.H2 U4.A4 | length 8.3
  Top Layer w0.127: U4.A4 11.566,29 11.696,28.87 11.696,27.129 12.175,26.65 v1(15.125,26.65) ; v1(16.3,26.65) U3.H2
  MidLayer1 w0.127: v1(15.125,26.65) v1(16.3,26.65)
ADDR3: U3.G1 U4.A5 | length 5.5
  Top Layer w0.127: U4.A5 v1(11.1,28.25) ; v1(12.6,27.85) U3.G1
  MidLayer1 w0.127: v1(11.1,28.25) 12.2,28.25 v1(12.6,27.85)
ADDR4: U3.G2 U4.B3 | length 9.8
  Top Layer w0.127: U4.B3 10.175,30.125 12.05,30.125 12.204,29.971 12.204,27.521 12.267,27.458 15.117,27.458 v1(15.125,27.45) ; v1(16.3,27.45) U3.G2
  MidLayer1 w0.127: v1(15.125,27.45) v1(16.3,27.45)
ADDR5: U3.F1 U4.B4 | length 6.3
  Top Layer w0.127: U4.B4 v1(10.175,28.625) ; v1(12.6,28.65) U3.F1
  MidLayer1 w0.127: v1(10.175,28.625) 10.192,28.642 12.592,28.642 v1(12.6,28.65)
ADDR6: U3.F2 U4.C3 | length 9.2
  Top Layer w0.127: U4.C3 v1(9.425,30.125) ; U3.F2 v1(17.1,29.05)
  MidLayer1 w0.127: v1(9.425,30.125) 13.175,30.125 13.85,29.45 16.7,29.45 v1(17.1,29.05)
ADDR7: U3.E1 U4.C4 | length 7.3
  Top Layer w0.127: U4.C4 v1(9.425,29.375) ; v1(12.6,29.45) U3.E1
  MidLayer1 w0.127: v1(9.425,29.375) 9.85,29.8 12.25,29.8 v1(12.6,29.45)
ADDR8: U3.E2 U4.D4 | length 8.9
  Top Layer w0.127: U4.D4 v1(8.675,28.625) ; v1(16.3,29.05) U3.E2
  MidLayer1 w0.127: v1(8.675,28.625) 9.5,28.625 9.925,29.05 v1(16.3,29.05)
ADDR9: U3.D1 U4.H2 | length 14.8
  Top Layer w0.127: U4.H2 4.6,30.5 4.35,30.75 4.35,32 4.575,32.225 12.575,32.225 14.55,30.25 U3.D1
ADDR10: U3.D2 U4.H3 | length 17
  Top Layer w0.127: U4.H3 4.55,29.75 4.096,30.204 4.096,32.121 4.454,32.479 12.771,32.479 14.6,30.65 v1(15.125,30.65) ; v1(16.3,30.65) U3.D2
  MidLayer1 w0.127: v1(15.125,30.65) v1(16.3,30.65)
ADDR11: U3.C1 U4.H4 | length 17.4
  Top Layer w0.127: U4.H4 4.275,29 3.842,29.433 3.842,32.226 4.349,32.733 12.876,32.733 14.559,31.05 U3.C1
ADDR12: U3.C2 U4.H5 | length 19.6
  Top Layer w0.127: U4.H5 4.25,28.25 3.588,28.912 3.588,32.331 4.244,32.987 12.981,32.987 14.518,31.45 v1(15.125,31.45) ; v1(16.3,31.45) U3.C2
  MidLayer1 w0.127: v1(15.125,31.45) v1(16.3,31.45)
ADDR13: U3.B1 U4.G3 | length 18.8
  Top Layer w0.127: v1(3.175,30.375) 3.175,32.35 4.066,33.241 13.087,33.241 14.478,31.85 U3.B1 ; v1(5.675,30.125) U4.G3
  MidLayer1 w0.127: v1(3.175,30.375) 3.425,30.125 v1(5.675,30.125)
ADDR14: U3.B2 U4.G4 | length 21.3
  Top Layer w0.127: v1@2.78,29.625 2.78,32.314 3.961,33.495 13.192,33.495 14.437,32.25 v1(15.125,32.25) ; v1(5.675,29.375) U4.G4 ; v1(16.3,32.25) U3.B2
  MidLayer1 w0.127: v1(2.775,29.625) 3.025,29.375 v1(5.675,29.375) ; v1(15.125,32.25) v1(16.3,32.25)
ADDR15: U3.A1 U4.F3 | length 22.7
  Top Layer w0.127: v1(2.375,29) 2.375,32.268 3.856,33.749 13.526,33.749 14.625,32.65 U3.A1 ; v1(6.425,29.375) U4.F3
  MidLayer1 w0.127: v1(2.375,29) 2.55,28.825 5.875,28.825 v1(6.425,29.375)
AGND: R10.2 U1.F6 U1.G6
ALE: R17.2 U3.A4 U3.J4 | length 8.2
  Top Layer w0.127: U3.J4 v1(18.7,25.85) ; U3.A4 v1(18.7,32.25)
  MidLayer1 w0.127: v1(18.7,25.85) v1(18.7,32.25)
  Bottom Layer w0.127: v1@18.725,25.825 R17.2
AREF: P1.6
AVDD: FB1.2 U1.F5 U1.G5
BE23_16: U1.D5 U4.A1 | length 24.1
  Top Layer w0.127: U4.A1 11.1,31.8 v1(11.6,31.8) ; v1(29.65,28.275) U1.D5
  Bottom Layer w0.127: v1(11.6,31.8) 13.375,31.8 15,33.425 24.2,33.425 24.575,33.05 24.575,30.52 26.821,28.275 v1(29.65,28.275)
BE31_24: U1.C4 U4.B2 | length 24.5
  Top Layer w0.127: U4.B2 10.175,30.875 10.825,30.875 11.35,31.4 v1(12.1,31.4) ; v1(29,27.625) U1.C4
  Bottom Layer w0.127: v1(12.1,31.4) 13.334,31.4 15.105,33.171 24.029,33.171 24.242,32.958 24.242,30.494 27.111,27.625 v1(29,27.625)
DAC0_OUT: P4.12
EECLK: R23.2 U6.56 U7.2 | length 9.4
  Top Layer w0.127: R23.2 64.132,19.982 64.6,20.45 U7.2 64.6,25.55 64.45,25.7 U6.56
EECS: R24.2 U6.1 U7.1 | length 12.2
  Top Layer w0.127: R24.2 64.96,18.585 65.25,18.875 U7.1 U6.1@65.25,27.375
EEDATA: R25.1 U6.55 U7.3 | length 3.9
  Top Layer w0.127: U7.3 U6.55
FB_ALE: R17.1 U1.D4 | length 10.2
  Top Layer w0.127: v1(29.65,26.975) U1.D4
  Bottom Layer w0.127: R17.1 28.5,25.825 v1(29.65,26.975)
FB_CS0: U1.D3
FB_CS2: R13.2 U1.B4 | length 16
  Top Layer w0.127: v1(26.075,27.7) 26.15,27.625 28.35,27.625 U1.B4
  Bottom Layer w0.127: R13.2 16.925,26.25 17.325,26.65 23.975,26.65 25.025,27.7 v1(26.075,27.7)
FB_OE: R11.2 U1.C9 | length 19.9
  Top Layer w0.127: v1(29,30.875) U1.C9
  Bottom Layer w0.127: R11.2 13.725,32.525 14.879,33.679 28.296,33.679 29,32.975 v1(29,30.875)
FB_RW: R12.2 U1.C5 | length 25.3
  Top Layer w0.127: U1.C5 v1(29.65,27.625)
  Bottom Layer w0.127: R12.2 21.125,25.325 21.371,25.571 28.8,25.571 30.05,26.821 30.05,27.225 v1(29.65,27.625)
FT_RXD: U6.13
FT_TXD: U6.12
GND: C1.1 C2.1 C3.1 C7.1 C8.2 C12.2 C13.1 C14.2 C15.1 C16.1 C17.1 C18.1 C21.2 C22.1 C23.2 C24.1 C25.1 C26.1 C27.1 C28.1 C29.1 C30.1 C31.1 C32.2 C33.1 C34.1 C35.2 C36.1 C37.1 C38.1 P1.8 P1.17 P3.11 P3.13 P5.3 P5.5 P5.7 P5.9 R10.1 R20.2 R30.1 R31.1 S3.1 SD*1.6 SD*1.10 SD*1.11 SD*1.12 SD*1.13 U1.F7 U1.G3 U1.G7 U1.K10 U1.L6 U2.2 U3.A3 U3.D3 U3.D4 U3.E3 U3.E4 U3.F3 U3.F4 U3.J3 U4.D1 U4.E6 U5.1 U5.11 U5.12 U6.10 U6.21 U6.41 U6.45 U7.5 U7.7 USB1.5 USB2.5 XTAL1.2
JTAG_TCK: P5.4 U1.J6 U6.32 | length 10.8
  Top Layer w0.127: U1.J6 v1(33.55,28.925)
  MidLayer1 w0.127: v1(33.55,28.925) 35.734,28.925 37.48,30.671 42.014,30.671 42.838,31.494
JTAG_TDI: P5.8 U1.H8 U6.33 | length 10.5
  Top Layer w0.127: U1.H8 v1(32.9,30.225)
  MidLayer1 w0.127: v1(32.9,30.225) 33.294,30.619 36.704,30.619 37.263,31.179 41.804,31.179 42.33,31.705
JTAG_TDO: P5.6 U1.J7 U6.34 | length 10.3
  Top Layer w0.127: U1.J7 v1(33.55,29.575)
  MidLayer1 w0.127: v1(33.55,29.575) 36.025,29.575 37.375,30.925 41.909,30.925 42.584,31.599
JTAG_TMS: P5.2 U1.H9 U6.35 | length 10.1
  Top Layer w0.127: U1.H9 v1(32.9,30.873)
  MidLayer1 w0.127: v1(32.9,30.873) 36.598,30.873 37.158,31.433 41.583,31.433 42.125,31.975
MRF_CS: U5.8
MRF_INT: U5.4
MRF_RESET: U5.2
MRF_SCK: U5.6
MRF_SDI: U5.5
MRF_SDO: U5.7
MRF_WAKE: U5.3
N_RST: C7.2 P5.10 R32.2 S3.2 U1.J11 | length 32.9
  Top Layer w0.127: v1(28.5,49) 28.825,49.325 28.825,49.6 28.892,49.667 S3.2 31.858,49.667 32.1,49.425 32.1,32.875 32.25,32.725 33,32.725 33.225,32.5 U1.J11 v1(33.55,31.525)
  MidLayer1 w0.127: v1(33.55,31.525) 36.891,31.525 37.053,31.687 40.875,31.687
  Bottom Layer w0.127: C7.2 v1(28.5,49)
NetC13_2: C13.2 U2.4
NetC21_1: C21.1 C22.2 IND2.2 U6.9 | length 7.1
  Top Layer w0.229: U6.9 v1(66.2,31.4)
  Bottom Layer w0.229: v1(66.2,31.4) 68.625,31.4 69,31.775 IND2.2
NetC23_1: C23.1 C24.2 IND3.2 U6.5 | length 7.1
  Top Layer w0.229: U6.5 66.575,29.4 67.125,29.95 v1(68.95,29.95)
  Bottom Layer w0.229: v1(68.95,29.95) IND3.2@72.1,29.95
NetC33_2: C33.2 U6.3 Y2.2 | length 8.3
  Top Layer w0.203: U6.3 66.475,28.4 66.65,28.225 66.65,24.85 66.802,24.698 C33.2 Y2.2@69.985,24.698
NetC35_1: C35.1 U6.4 Y2.1 | length 4.7
  Top Layer w0.203: U6.4 Y2.1@69.933,28.9
NetC36_2: C36.2 FB2.2 XTAL1.4 | length 4.2
  Top Layer w0.508: XTAL1.4 v4@35.514,36.689
  Bottom Layer w0.508: v4(35.525,36.7) FB2.2 C36.2
NetC37_2: C37.2 R26.1 R27.1 Y1.1 | length 4.3
  Top Layer w0.254: R26.1 R27.1@41.024,28.327 ; R27.1 C37.2
NetC38_2: C38.2 R27.2 R28.1 Y1.2 | length 4.3
  Top Layer w0.254: R28.1 R27.2@41.027,26.93 ; C38.2 R27.2
NetL3_2: L3.2 R31.2
NetL4_1: L4.1 R18.1 | length 1.5
  Top Layer w0.203: L4.1 v1(60.29,40.168)
  Bottom Layer w0.203: v1(60.29,40.168) R18.1
NetL5_1: L5.1 R19.1 | length 1.5
  Top Layer w0.203: L5.1 v1(58.131,40.168)
  Bottom Layer w0.203: v1(58.131,40.168) R19.1
NetLS1_1: LS1.1 LS1.1A
NetLS1_2: LS1.2 LS1.2A
NetP2_9: P2.9 R1.1
NetR2_2: R2.2 USB1.2
NetR3_2: R3.2 USB1.3
NetR9_2: R9.2 U1.J8 | length 3.5
  Top Layer w0.127: U1.J8 33.55,30.225 v1(35.675,30.225)
  Bottom Layer w0.127: v1(35.675,30.225) R9.2
NetR11_1: R11.1 R16.1 U4.A2 | length 2.7
  Top Layer w0.127: U4.A2 v1@11.075,30.5
  Bottom Layer w0.127: v1(11.1,30.525) 11.1,31.854 11.425,32.179 R11.1
NetR12_1: R12.1 R15.1 U4.G5 | length 3.1
  Top Layer w0.127: v1@5.675,27 5.675,27.875 U4.G5
  Bottom Layer w0.127: R12.1@5.65,25.325 v1(5.65,27)
NetR13_1: R13.1 R14.1 U4.B5 | length 4
  Top Layer w0.127: U4.B5 v1(10.175,27.875)
  Bottom Layer w0.127: v1(10.175,27.875) 10.192,27.858 11.292,27.858 11.975,27.175 R14.1 R13.1
NetR20_1: R20.1 U6.6 | length 1.5
  Top Layer w0.254: U6.6 v1(65.925,29.9)
  Bottom Layer w0.254: v1@65.975,29.9 R20.1@66.725,29.9
NetR21_1: R21.1 U6.11 | length 1.5
  Top Layer w0.229: U6.11 v1(65.925,32.4)
  Bottom Layer w0.229: v1(65.925,32.4) R21.1
NetR22_2: R22.2 R25.2 U7.4 | length 5.5
  Top Layer w0.127: R22.2 63.054,21.379 63.3,21.625 U7.4 62.5,22.725 62.4,22.825 R25.2
NetR29_1: R29.1 R30.2 U1.G2 | length 4.1
  Top Layer w0.127: U1.G2 32.25,25.675 32.25,25.075 v1(32.9,24.425)
  Bottom Layer w0.127: R29.1 R30.2 v1(32.9,24.425)
NetR29_2: R29.2 U1.G1 | length 5.1
  Top Layer w0.127: U1.G1 31.925,22.825 32.4,22.35 v1(33.65,22.35)
  Bottom Layer w0.127: v1(33.65,22.35) R29.2
PTA1: P2.10
PTA2: P2.6
PTB2: P4.1
PTB3: P4.3
PTB9: P2.12
PTB10: P4.5
PTB11: P4.7
PTB20: P4.10
PTB23: P2.8
PTC0: P2.5
PTC1: P2.11
PTC2: P2.4
PTC3: P2.2
PTC4: P1.18
PTC5: P2.1
PTC7: P2.3
PTC8: R1.2
PTC9: P2.7
PTC10: P4.11
PTC11: P4.9
PTC12: P1.20
PTC16: P2.16
PTC17: P2.14
PTC18: P2.15
PTC19: P2.13
PTD0: P1.16
PTD1: P1.10
PTD2: P1.14
PTD3: P1.12
PTE0: R8.2 SD*1.8 U1.E4 | length 5.9
  Top Layer w0.127: v1(30.3,27.625) U1.E4
  MidLayer1 w0.127: 28.75,22.8 29.85,23.9 29.85,26.575 30.042,26.767 30.042,27.367 v1(30.3,27.625)
PTE1: R7.2 SD*1.7 U1.E3 | length 4.6
  Top Layer w0.127: v1(30.3,26.325) U1.E3
  MidLayer1 w0.127: 29.138,22.688 30.3,23.85 v1(30.3,26.325)
PTE2: SD*1.5 U1.E2 | length 3.6
  Top Layer w0.127: 30.3,22.55 30.3,25.675 U1.E2
PTE3: R6.2 SD*1.3 U1.F4 | length 5.9
  Top Layer w0.127: U1.F4 v1(31.6,27.625)
  MidLayer1 w0.127: 29.75,22.925 30.846,24.021 30.846,26.775 31.6,27.529 v1(31.6,27.625)
PTE4: R5.2 SD*1.2 U1.H7 | length 0.5
  Top Layer w0.127: U1.H7 v1(32.9,29.575)
PTE5: R4.2 SD*1.1 U1.G4 | length 5.1
  Top Layer w0.127: v1(31.6,26.975) U1.G4
  MidLayer1 w0.127: 30.175,22.9 31.1,23.825 31.1,26.475 v1(31.6,26.975)
PTE6: SD*1.9 U1.F3 | length 5.6
  Top Layer w0.127: U1.F3 v1(31.6,26.325)
  MidLayer1 w0.127: 29.676,22.001 31.6,23.925 v1(31.6,26.325)
PTE24: P1.2
PTE25: P1.4
PTE26: P1.19
RESET: P3.5
RTCX1: R26.2 U1.L5 | length 2.2
  Top Layer w0.254: U1.L5 35.5,27.95 35.877,28.327 R26.2
RTCX2: R28.2 U1.L4 | length 2.2
  Top Layer w0.254: U1.L4 35.5,27.3 35.87,26.93 R28.2
RXD_LED: L4.2 U6.25 | length 2.6
  Top Layer w0.203: U6.25 59.45,35.375 60.29,36.215 L4.2
TXD_LED: L5.2 U6.26 | length 2.6
  Top Layer w0.203: L5.2 58.131,36.144 58.95,35.325 U6.26
USB0D_N: U6.7 USB2.2 | length 10
  Top Layer w0.203: U6.7 USB2.2@75.275,30.4
USB0D_P: U6.8 USB2.3 | length 10
  Top Layer w0.203: U6.8 USB2.3@75.2,30.9
USB1_ID: U1.J4 USB1.4 | length 0.5
  Top Layer w0.127: U1.J4 v1(33.55,27.625)
USB1D_N: R2.1 U1.F2 | length 1.4
  Top Layer w0.127: 30.941,24.716 30.941,25.666 U1.F2
USB1D_P: R3.1 U1.F1 | length 0.9
  Top Layer w0.127: 31.275,24.434 31.275,24.825 U1.F1
VBUS0: D1.1 USB2.1
VBUS1: D2.1 USB1.1
VCC: D1.2 D2.2 F1.1 P3.15
pads on no net: L1.1 L1.2 L2.1 L2.2 P1.1 P1.5 P1.11 P3.1 P3.2 P3.4 P3.6 P3.8 P3.10 P3.12 P3.14 P3.16 S1.1 S1.2 S1.3 S1.4 S2.1 S2.2 S2.3 S2.4 S4.1 S4.2 U1.A1 U1.A4 U1.A5 U1.A6 U1.A9 U1.A10 U1.A11 U1.B1 U1.B5 U1.B6 U1.B8 U1.B11 U1.C1 U1.C2 U1.C11 U1.D1 U1.D2 U1.D11 U1.E1 U1.E8 U1.E11 U1.F8 U1.F9 U1.F10 U1.F11 U1.G8 U1.G9 U1.G10 U1.G11 U1.H1 U1.H2 U1.H3 U1.H4 U1.H5 U1.H6 U1.H10 U1.H11 U1.J1 U1.J2 U1.J3 U1.J5 U1.J9 U1.J10 U1.K1 U1.K2 U1.K3 U1.K4 U1.K5 U1.K7 U1.K8 U1.K9 U1.K11 U1.L1 U1.L2 U1.L3 U1.L7 U1.L8 U1.L9 U3.A2 U3.A5 U3.B3 U3.B4 U3.H3 U3.H4 U3.J2 U3.J5 U4.E3 U4.H6 U5.9 U6.14 U6.15 U6.17 U6.18 U6.19 U6.20 U6.22 U6.23 U6.24 U6.27 U6.28 U6.29 U6.30 U6.37 U6.38 U6.39 U6.40 U6.42 U6.46 U6.47 U6.48 U6.49 U6.51 U6.52 U6.53 U6.54 U6.57 USB1.0 USB1.6 USB1.7 USB1.8 USB2.0 USB2.4 USB2.6 USB2.7 USB2.8 XTAL1.1
copper on no net:
  other v1: 32.9,26.325 33.55,26.325 32.25,26.975 32.9,26.975 33.55,26.975 32.25,27.625 32.9,27.625 31.6,28.925 32.25,28.925 32.9,28.925 31.6,30.225 32.25,30.225 31.6,30.875 32.25,30.875
  other v2: 59,28.45 60.1,28.45 61.2,28.45 62.3,28.45 63.4,28.45 59,29.55 60.1,29.55 61.2,29.55 62.3,29.55 63.4,29.55 59,30.65 60.1,30.65 61.2,30.65 62.3,30.65 63.4,30.65 59,31.75 60.1,31.75 61.2,31.75 62.3,31.75 63.4,31.75 59,32.85 60.1,32.85 61.2,32.85 62.3,32.85 63.4,32.85
  other v3: 8.898,-5.07 16.898,-5.07

## Polygon pours and split planes (outlines as drawn)
GND on GROUND PLANE (split plane): 80.77,0.51 0.51,0.51 0.51,52.83 80.77,52.83

## Keep-outs
Keep-Out Layer:
  the board outline again, w0.254